# Altium PCB altiumDesignerPCBLayout.pcbdoc
Units mil, origin at the board's own origin, x right, y up, seen from the top; angles counter-clockwise.
Board outline 3803.4 x 3533.4 mil, 2 copper layers (Top Layer, Bottom Layer); 34 components, 50 nets, 158 pads, 40 vias.
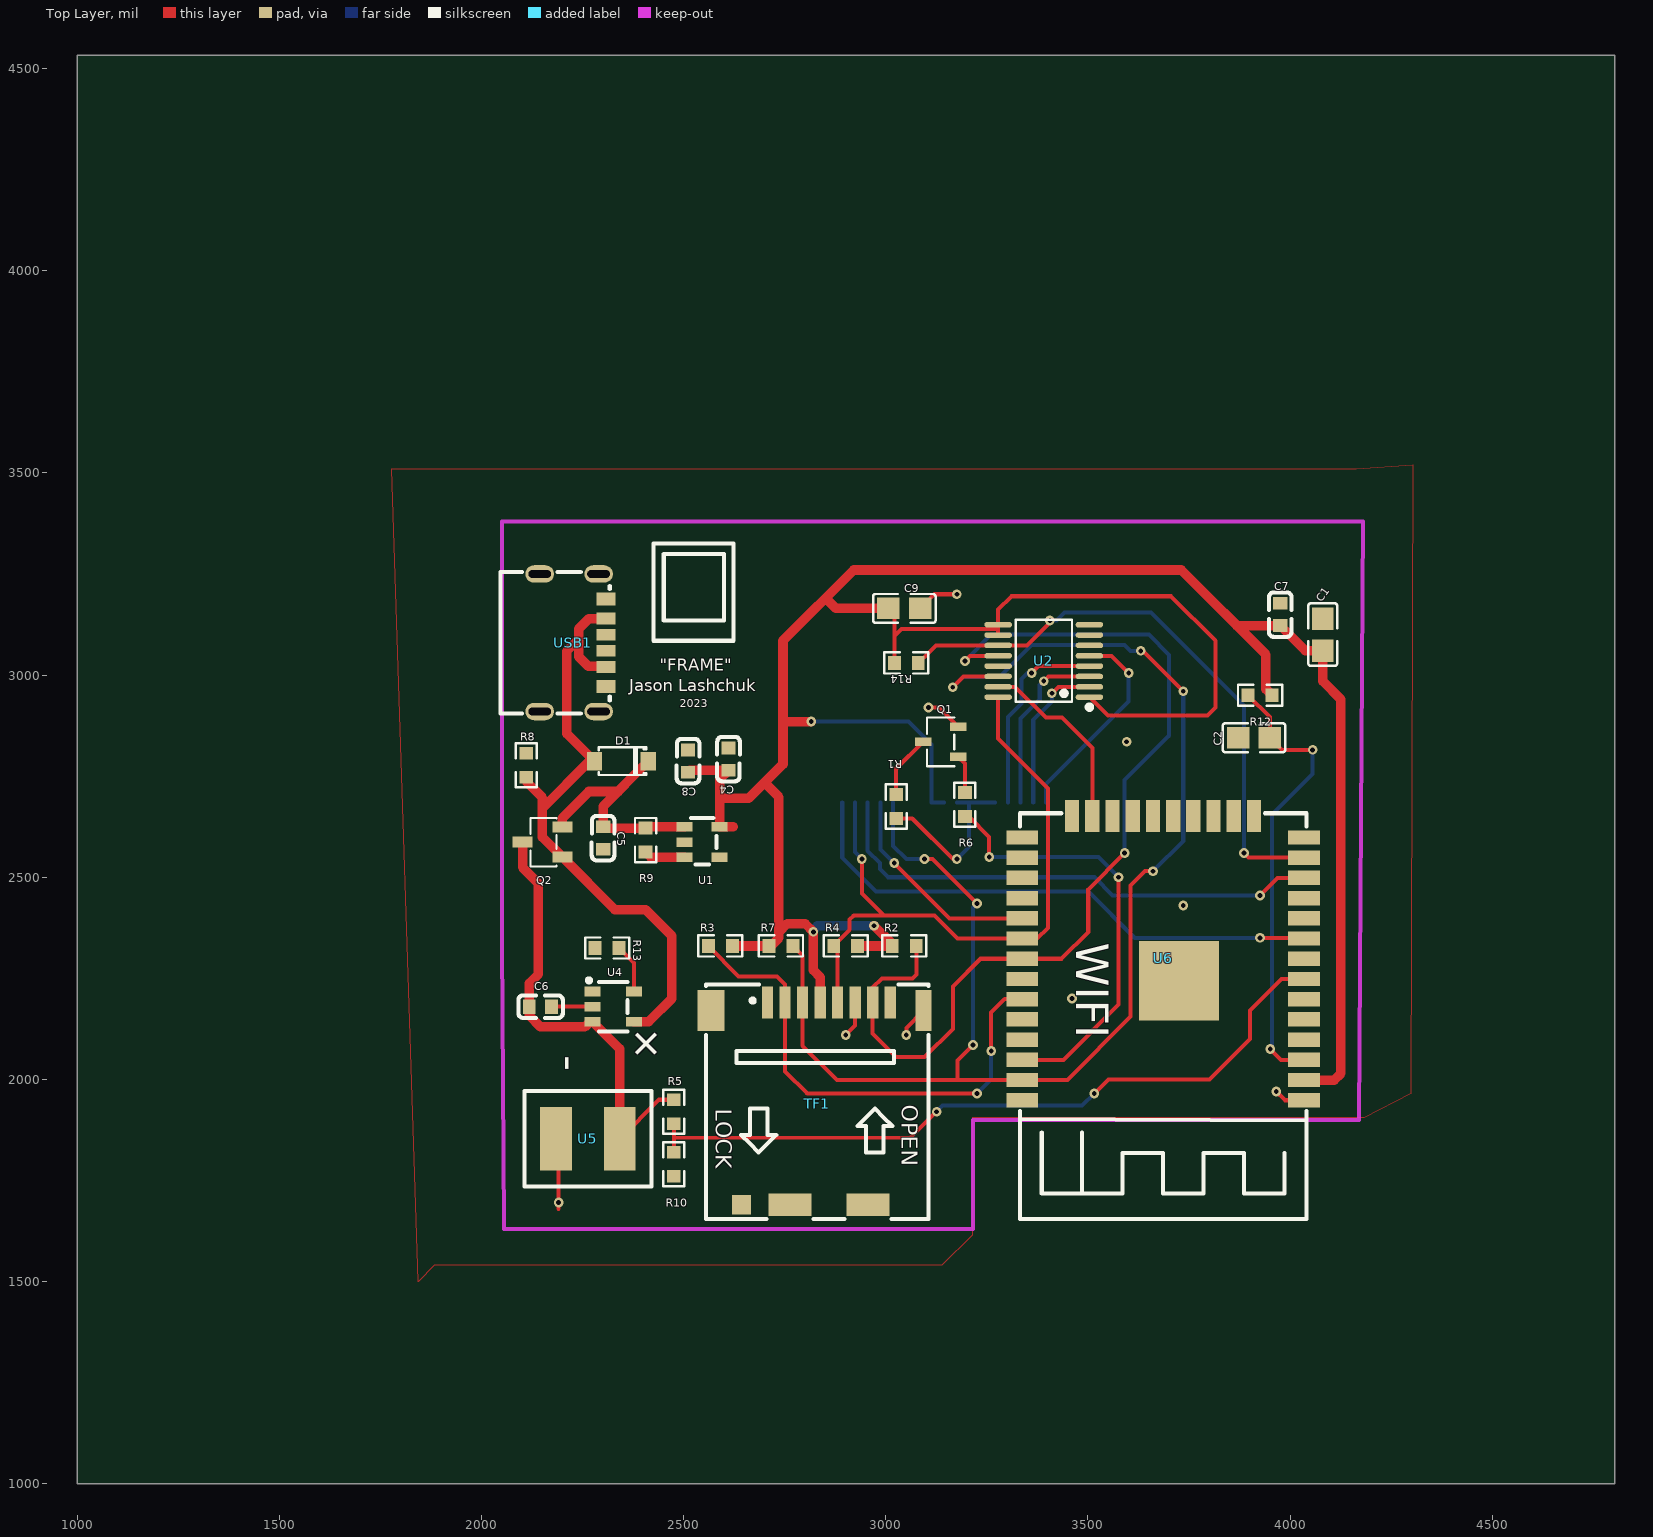
[diagram p0: Top Layer view]
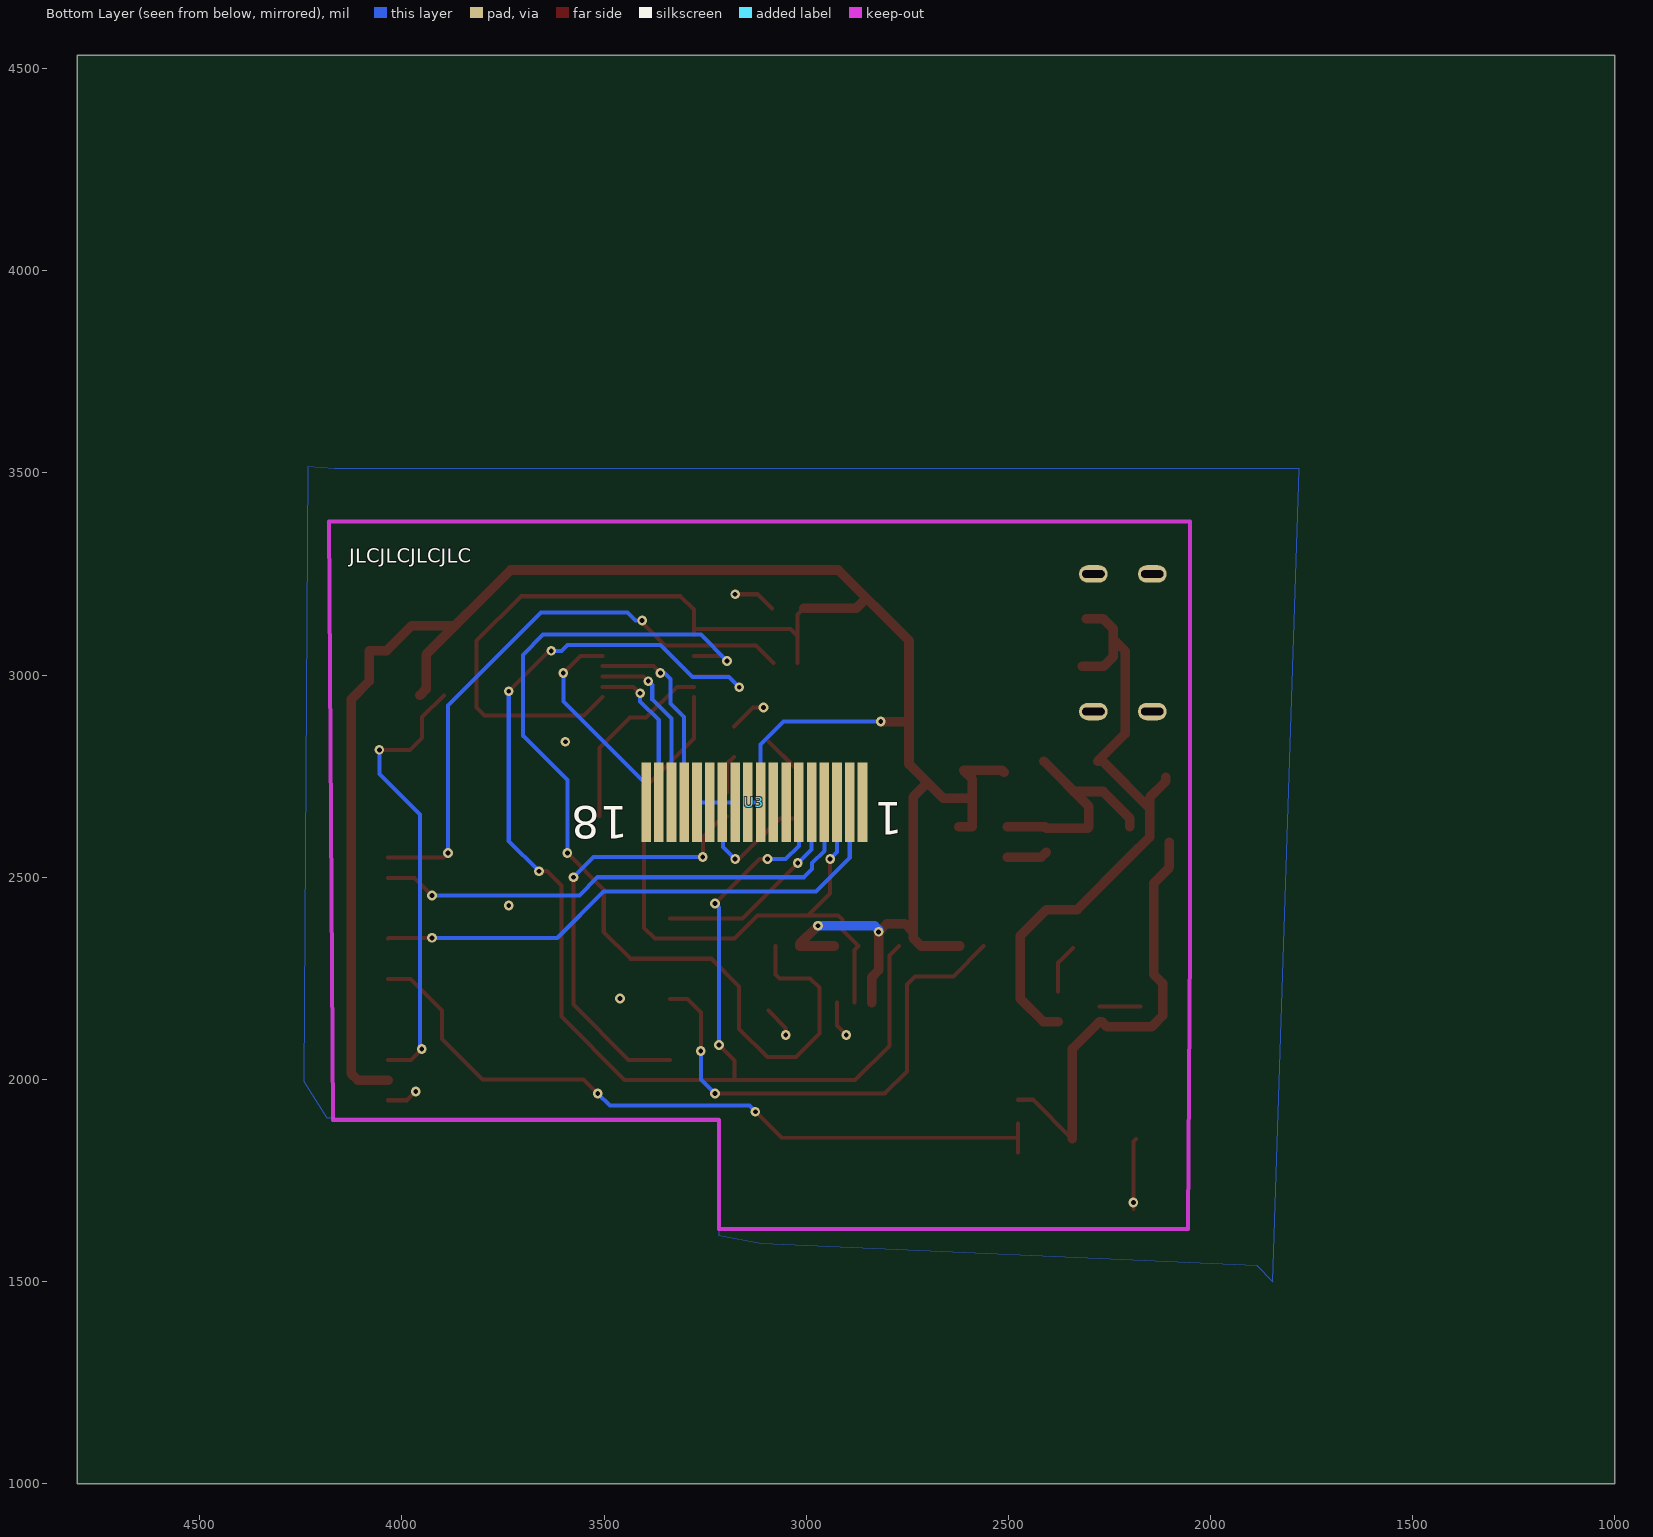
[diagram p1: Bottom Layer view, seen from below]

## Layer stack, top to bottom
Top Layer: signal copper (thickness not stored)
Dielectric: dielectric 12.6, FR-4, Dk 4.8
Bottom Layer: signal copper (thickness not stored)

## Board outline
4803.4,1000 1000,1000 1000,4533.4 4803.4,4533.4

## Components (designator, comment, footprint, x,y, rotation, side; value= is the part's Value field where it differs from the comment)
C1 "0.1uf" C0805 4080.9,3100 r90 top
C2 "0.1uf" C0805 3910.9,2845 r180 top
C4 "10uf" C0603 2610.9,2792.03 r270 top
C5 "10uf" C0603 2300.9,2597.03 r90 top
C6 "10uf" C0603 2145.9,2180 r180 top
C7 "10uf" C0603 3975.9,3150 r90 top
C8 "1uf" C0603 2510.9,2787.03 r270 top
C9 "0.1uf" C0805 3045.9,3165 r0 top
D1 "LMBR120FT1G" SOD-123_L2.8-W1.8-LS3.7-RD 2345.9,2787.03 r180 top
Q1 "S8050_C2146" SOT-23-3_L3.0-W1.7-P0.95-LS2.9-BR 3135.9,2835 r0 top
Q2 "DMG3415U-7" SOT-23-3_L2.9-W1.6-P1.90-LS2.8-BR-CW 2150.9,2587.03 r0 top
R1 "10 r" R0603 3025.9,2675 r270 top
R2 "1k" R0603 3045.9,2330 r180 top
R3 "1k" R0603 2590.9,2330 r0 top
R4 "1k" R0603 2900.9,2330 r180 top
R5 "100k" R0603 2475.9,1920 r90 top
R6 "1k" R0603 3195.9,2679.66 r90 top
R7 "1k" R0603 2740.9,2330 r180 top
R8 "100k" R0603 2110.9,2777.03 r270 top
R9 "100k" R0603 2405.9,2592.03 r90 top
R10 "100k" R0603 2475.9,1790 r90 top
R12 "10k" R0603 3925.9,2950 r180 top
R13 "2k" R0603 2310.9,2325 r180 top
R14 "50k" R0603 3050.9,3030 r0 top
TF1 "DM3CS-SF" TF-SMD_DM3CS-SF 2830.9,1940 r180 top
U1 "TPAP2112K-3.3TRG1" SOT-23-5_L2.9-W1.6-P0.95-LS2.8-BR 2545.9,2587.03 r180 top
U2 "XPT2046" TSSOP-16_L5.0-W4.4-P0.65-LS6.4-BL 3390.9,3035 r90 top
U3 "18 pin 0.8mm pitch LCD SMD connection" "SMD TFT 18PIN 0.8MM" 2860.9,2685 r180 bottom
U4 "MCP73831T-2ACI/OT" SOT-23-5_L3.0-W1.7-P0.95-LS2.8-BR 2325.9,2180 r180 top
U5 "Battery Pad" BATTERY_PAD 2420.9,1735 r180 top
U6 "ESP32-SOLO-1" WIFIM-SMD_38P-L25.5-W18.0-P1.27 3685.9,2300 r180 top
USB1 "HC-TYPE-C-6P-01A" USB-C-SMD_HC-TYPE-C-6P-01A 2225.9,3080 r270 top
? "" ? 1778.95,2505 r0 top
? "" ? 3103.4,3703.2 r0 top

## Footprints (in the part's own frame and the unit in brackets; to place one, negate y for a bottom-side part, rotate by r counter-clockwise, add the part's x,y. Pads: shape width x height; smd on the part's side, far side on the other; paste and mask are expansions set on the pad)
BATTERY_PAD [mm]
  rect 2x4 smd paste+0 mask+0.051: 1(2,-3) 2(6,-3)
  silkscreen extent 0,-6 8,0
C0603 [mm]
  rect 0.8x0.9 smd paste+0 mask+0.051: 1(-0.7,0) 2(0.7,0)
  silkscreen extent -1.41,-0.71 1.39,0.72
C0805 [mm]
  rect 1.41x1.35 smd paste-100 mask+0.051: 1(-1,0) 2(1,0)
  silkscreen extent -1.96,-0.9 1.96,0.9
R0603 [mil]
  rect 31.75x34.02 smd paste-3937.01 mask+2: 1(-29.66,0) 2(29.66,0)
  silkscreen extent -55,-26 55,26
"SMD TFT 18PIN 0.8MM" [mm]
  rect 0.6x5 smd paste+0 mask+0.051: 1(0,0) 2(-0.8,0) 3(-1.6,0) 4(-2.4,0) 5(-3.2,0) 6(-4,0) 7(-4.801,0) 8(-5.601,0) 9(-6.401,0) 10(-7.201,0) 11(-8.001,0) 12(-8.801,0) 13(-9.601,0) 14(-10.399,0) 15(-11.199,0) 16(-11.999,0) 17(-12.799,0) 18(-13.599,0)
SOD-123_L2.8-W1.8-LS3.7-RD [mm]
  rect 0.95x1.15 smd paste+0 mask+0.051: 1(-1.693,0) 2(1.693,0)
  silkscreen extent -1.58,-0.87 1.41,0.87
SOT-23-3_L2.9-W1.6-P1.90-LS2.8-BR-CW [mm]
  rect 1.25x0.7 smd paste+0 mask+0.051: 1(1.25,-0.95) 2(-1.25,0) 3(1.25,0.95)
  silkscreen extent -0.76,-1.52 0.89,1.52
SOT-23-3_L3.0-W1.7-P0.95-LS2.9-BR [mm]
  rect 1.037x0.532 smd paste+0 mask+0.051: 1(1.101,-0.95) 2(1.101,0.95) 3(-1.101,0)
  silkscreen extent -0.86,-1.53 0.86,1.53
SOT-23-5_L2.9-W1.6-P0.95-LS2.8-BR [mm]
  rect 1x0.6 smd paste+0 mask+0.05: 1(1.1,-0.95) 2(1.1,0) 3(1.1,0.95) 4(-1.1,0.95) 5(-1.1,-0.95)
  silkscreen extent -0.89,-1.52 0.7,1.4
SOT-23-5_L3.0-W1.7-P0.95-LS2.8-BR [mm]
  rect 1x0.6 smd paste+0 mask+0.051: 1(1.3,-0.95) 2(1.3,0) 3(1.3,0.95) 4(-1.3,0.95) 5(-1.3,-0.95)
  silkscreen extent -0.9,-1.78 1.65,1.55
TF-SMD_DM3CS-SF [mm]
  rect 0.7x2 smd paste+0 mask+0.051: 1(3.125,-6.35) 2(2.025,-6.35) 3(0.925,-6.35) 4(-0.177,-6.35) 5(-1.275,-6.35) 6(-2.375,-6.35) 7(-3.475,-6.35) 8(-4.575,-6.35)
  rect 2.7x1.4 smd paste+0 mask+0.051: 9(1.724,6.35) 12(-3.176,6.35)
  rect 1.7x2.6 smd paste+0 mask+0.051: 10(6.674,-5.851)
  rect 1x2.6 smd paste+0 mask+0.051: 11(-6.674,-5.851)
  rect 1.2x1.2 smd paste+0 mask+0.051: 13(4.775,6.35)
  silkscreen extent -6.99,-7.49 6.99,7.24
TSSOP-16_L5.0-W4.4-P0.65-LS6.4-BL [mm]
  oval 0.343x1.731 smd paste+0 mask+0.051: 1(-2.275,-2.866) 2(-1.625,-2.866) 3(-0.975,-2.866) 4(-0.325,-2.866) 5(0.325,-2.866) 6(0.975,-2.866) 7(1.625,-2.866) 8(2.275,-2.866) 9(2.275,2.866) 10(1.625,2.866) 11(0.975,2.866) 12(0.325,2.866) 13(-0.325,2.866) 14(-0.975,2.866) 15(-1.625,2.866) 16(-2.275,2.866)
  silkscreen extent -3.05,-3.02 2.58,1.77
USB-C-SMD_HC-TYPE-C-6P-01A [mm]
  oval 1.1x1.8 hole 0.5 slot 1.401 at 90 deg paste+0 mask+0.051: 1(-4.32,1.622) 2(-4.32,-2.078) 3(4.32,1.622) 4(4.32,-2.078)
  rect 0.7x1.2 smd paste-100 mask+0.051: A5(-0.5,2.078) B5(0.5,2.078)
  rect 0.76x1.2 smd paste-100 mask+0.051: A9(1.52,2.078) B9(-1.52,2.078)
  rect 0.8x1.2 smd paste-100 mask+0.051: A12(2.749,2.078) B12(-2.75,2.078)
  silkscreen extent -4.44,-4.54 4.45,2.32
WIFIM-SMD_38P-L25.5-W18.0-P1.27 [mm]
  rect 2x0.9 smd paste+0 mask+0.051: 1(-8.85,8.93) 2(-8.85,7.66) 3(-8.85,6.39) 4(-8.85,5.12) 5(-8.85,3.85) 6(-8.85,2.58) 7(-8.85,1.31) 8(-8.85,0.04) 9(-8.85,-1.23) 10(-8.85,-2.5) 11(-8.85,-3.77) 12(-8.85,-5.04) 13(-8.85,-6.31) 14(-8.85,-7.58) 25(8.85,-7.58) 26(8.85,-6.31) 27(8.85,-5.04) 28(8.85,-3.77) 29(8.85,-2.5) 30(8.85,-1.23) 31(8.85,0.04) 32(8.85,1.31) 33(8.85,2.58) 34(8.85,3.85) 35(8.85,5.12) 36(8.85,6.39) 37(8.85,7.66) 38(8.85,8.93)
  rect 0.9x2 smd paste+0 mask+0.051: 15(-5.715,-8.93) 16(-4.445,-8.93) 17(-3.175,-8.93) 18(-1.905,-8.93) 19(-0.635,-8.93) 20(0.635,-8.93) 21(1.905,-8.93) 22(3.175,-8.93) 23(4.445,-8.93) 24(5.715,-8.93)
  rect 5x5 smd paste+0 mask+0.051: 39(-1,1.43)
  silkscreen extent -9,-9.1 9,16.4
? [mil]

## Via types
v1: diameter 24, hole 12, Top Layer to Bottom Layer, tented both sides, 40 vias

## Nets (pads, with @x,y where several pads share a name; then routed paths per layer and width w, separated by ;. In a path a pad name is that pad's centre, name@x,y a point inside that pad or via, vN(x,y) a via of type N, cw(c..) or ccw(c..) an arc to the next point about the centre after c; other vN are vias at no path point)
+3.3V: C1.1 C4.2 C7.1 C8.2 C9.1 R2.2 R3.2 R4.1 R7.2 R12.1 R14.1 TF1.4 U1.5 U2.1 U2.9 U2.10 U3.9 U3.10 U6.2 | length 7179
  Top Layer w10: C9.1 3021.24,3150.29 R14.1 ; 3021.24,3096.68 3038.74,3114.18 3278.07,3114.18 ; U2.10 U2.9 ; 3278.1,3116.2 3278.1,3162.2 3310.9,3195 3705.9,3195 3815.9,3085 3815.9,2920 3795.9,2900 3549.2,2900 U2.1
  Top Layer w23.62: C8.2 2515.9,2764.47 C4.2 2589.22,2742.78 U1.5 2623.31,2624.43 ; 2589.2,2695 2660.9,2695 2745.9,2780 2745.9,3085.1 2920.8,3260 3730.9,3260 3940.4,3050.5 3940.4,2965.2 R12.1 ; R3.2 R7.2 ; 2668.2,2330 2658.2,2330 2715.9,2330 2735.9,2350 ; 2700,2734.1 2735.9,2698.19 2735.9,2350 ; 2745.9,2880.4 2750.5,2885 v1(2815.9,2885) ; TF1.4 2837.87,2253.03 2820.9,2270 v1(2820.9,2365) 2800.9,2385 2755.9,2385 2735.9,2365 2735.9,2350 ; 2851.37,3190.57 2876.94,3165 C9.1 ; R4.1 R2.2 3016.25,2334.66 v1(2970.9,2380) ; 3845.84,3145.06 3868.46,3122.44 C7.1 4037.71,3060.63 C1.1 ; U6.2 4109.3,1998.4 4125.9,2015 4125.9,2940 4080.9,2985 C1.1
  Bottom Layer w10: v1(2815.9,2885) 3055.9,2885 3112.9,2828 U3.9 ; U3.9 U3.10
  Bottom Layer w23.62: v1@2820.9,2370 2830.9,2380 v1(2970.9,2380)
+VBAT: C6.2 Q2.2 R5.2 U4.3 U5.1 | length 1119.2
  Top Layer w10: U5.1 2438.71,1949.66 R5.2
  Top Layer w23.62: Q2.2 2101.7,2524.2 2140.9,2485 2140.9,2260 2118.3,2237.4 C6.2 ; C6.2 2118.34,2157.56 2145.9,2130 2255.9,2130 2268.5,2142.6 U4.3 2342.16,2075.15 U5.1
+VUSB: D1.2 Q2.1 R8.2 U4.4 USB1.A9 USB1.B9 | length 1611.6
  Top Layer w23.62: R8.2 2110.9,2737.03 2150.9,2697.03 2150.9,2598.83 Q2.1 2329.74,2420 2405.9,2420 2470.9,2355 2470.9,2200 2413.5,2142.6 U4.4 ; 2150.9,2670.54 2267.4,2787.03 D1.2 ; 2240.9,3089.2 2210.9,3059.2 2210.9,2855.4 D1.2 ; USB1.B9 2265.8,3139.9 2240.9,3115 2240.9,3045 2263.7,3022.2 USB1.A9@2317.7,3022.2
BAT_LEVEL: R5.1 R10.2 U6.7 | length 1832.7
  Top Layer w10: R10.2 R5.1 ; 2475.9,1855 3061.76,1855.86 v1(3125.9,1920) ; v1(3515.9,1965) 3550.9,2000 3800.9,2000 3900.9,2100 3900.9,2170 3979.32,2248.42 U6.7
  Bottom Layer w10: v1(3125.9,1920) 3140.9,1935 3485.9,1935 v1(3515.9,1965)
CLK: R4.2 TF1.5 U2.16 U3.3 U6.30 | length 1685.3
  Top Layer w10: R4.2@2870.9,2330 2910.9,2370 2910.9,2395 2920.9,2405 3120.9,2405 3177.48,2348.42 U6.30 ; R4.2 2881.1,2320.14 TF1.5 ; v1(2940.9,2545) 2940.9,2459.89 2995.8,2405 ; U2.16 3278.1,2842.8 3400.9,2720 3400.9,2375 3374.3,2348.4 U6.30
  Bottom Layer w10: U3.3 2923.89,2562.01 v1(2940.9,2545)
GND: C1.2 C2.2 C4.1 C5.1 C6.1 C7.2 C8.1 C9.2 Q1.2 R8.1 R10.1 R13.2 TF1.6 TF1.10 TF1.11 TF1.12 TF1.13 U1.2 U2.6 U2.7 U2.8 U3.1 U3.8 U4.2 U5.2 U6.1 U6.15 U6.38 U6.39 USB1.1 USB1.2 USB1.3 USB1.4 USB1.A12 USB1.B12 | length 720.3
  Top Layer w10: C6.1 U4.2 ; U5.2 2190.9,1846.89 v1(2190.9,1695.59) 2190.9,1680 ; v1(2900.9,2110) 2924.41,2133.51 TF1.6 ; v1(3050.9,2110) 3050.9,2127.56 TF1.11 ; C9.2 3120.27,3200 v1(3175.9,3200) ; v1(3105.9,2920) 3131.66,2920 Q1.2 ; v1(3965.9,1970) 3987.48,1948.42 U6.1
  other v1: 3460.9,2200 3735.9,2430 3595.9,2835
LCD_BL: R6.1 U6.36 | length 1081.4
  Top Layer w10: R6.1 3205.9,2650 3255.9,2600 v1(3255.9,2550) ; U6.36 3439.32,2048.42 3575.9,2185 v1(3575.9,2500)
  Bottom Layer w10: v1(3255.9,2550) 3525.9,2550 v1(3575.9,2500)
LCD_CS: U3.5 U6.29 | length 537.2
  Top Layer w10: v1(3020.9,2535) 3157.48,2398.42 U6.29
  Bottom Layer w10: U3.5 2986.89,2569.02 v1(3020.9,2535)
LCD_DC: U3.4 U6.12 | length 1271
  Top Layer w10: v1(3925.9,2455) 3969.32,2498.42 U6.12
  Bottom Layer w10: U3.4 2955.4,2565.5 2985.9,2535 2985.9,2520 3005.9,2500 3515.9,2500 3560.9,2455 v1(3925.9,2455)
LCD_RST: U3.2 U6.9 | length 1361.3
  Top Layer w10: v1(3925.9,2350) 4032.75,2350 U6.9
  Bottom Layer w10: U3.2 2892.4,2548.5 2975.9,2465 3500.9,2465 3615.9,2350 v1(3925.9,2350)
LEDK: R1.2 U3.11 U3.12 U3.13 U3.14 | length 439.1
  Top Layer w10: R1.2 3065.57,2645.34 3165.91,2545 v1(3175.9,2545)
  Bottom Layer w10: U3.11 U3.12 ; v1(3175.9,2545) 3205.9,2575 3205.9,2683.55 U3.12 ; U3.14@3270.35,2685.01 U3.13 U3.12
MISO: R2.1 TF1.7 U2.12 U6.31 | length 2460.6
  Top Layer w10: R2.1 3075.56,2259.66 3065.9,2250 2990.9,2250 2967.72,2226.82 TF1.7 2967.7,2113.2 3025.9,2055 3095.9,2055 3165.9,2125 3165.9,2230 3234.3,2298.4 U6.31 ; v1(3195.9,3035) 3208.7,3047.8 U2.12 ; U6.31 3434.32,2298.42 3500.9,2365 3500.9,2470 v1(3590.9,2560)
  Bottom Layer w10: v1(3195.9,3035) 3260.9,3100 3650.9,3100 3700.9,3050 3700.9,2850 3590.9,2740 v1(3590.9,2560)
MOSI: R7.1 TF1.3 U2.14 U3.6 U6.37 | length 3653.6
  Top Layer w10: R7.1 2794.49,2306.07 TF1.3 2794.5,2083.2 2879.3,1998.4 3224.6,1998.4 U6.37 3449.32,1998.42 3605.9,2155 3605.9,2480 3640.9,2515 v1(3660.9,2515) ; v1(3095.9,2545) 3115.9,2545 v1(3225.9,2435) ; v1(3165.9,2970) 3192.51,2996.61 U2.14 ; 3177.74,1998.4 3177.74,2046.84 v1(3215.9,2085) ; v1(3630.9,3060) 3635.9,3060 v1(3735.9,2960)
  Bottom Layer w10: U3.6 3018.4,2577.5 3050.9,2545 v1(3095.9,2545) ; v1(3165.9,2970) 3190.9,2995 3280.9,2995 3360.9,3075 3590.9,3075 3605.9,3060 v1(3630.9,3060) ; v1(3215.9,2085) 3215.9,2425 v1(3225.9,2435) ; v1(3660.9,2515) 3735.9,2590 v1(3735.9,2960)
Q1_1: Q1.1 R6.2 | length 95.2
  Top Layer w10: Q1.1 3195.9,2780.96 R6.2
Q1_3: Q1.3 R1.1 | length 157.9
  Top Layer w10: R1.1 3025.9,2768.36 Q1.3
SD_CS: R3.1 TF1.2 U6.33 | length 1246.7
  Top Layer w10: R3.1 2636.24,2255 2730.9,2255 2751.18,2234.72 TF1.2 2751.18,2019.72 2805.9,1965 v1(3225.9,1965) ; v1(3260.9,2070) 3260.9,2165 3294.32,2198.42 U6.33
  Bottom Layer w10: v1(3225.9,1965) 3260.9,2000 v1(3260.9,2070)
TOUCH_CS: U2.15 U6.23 | length 463.8
  Top Layer w10: U2.15 3319.88,2971.02 3395.9,2895 3435.9,2895 3510.9,2820 U6.23
TOUCH_IRQ: R14.2 U2.11 U6.13 | length 1473.5
  Top Layer w10: R14.2 3123.95,3073.39 U2.11 3349.29,3073.39 3405.9,3130 v1(3405.9,3135) ; v1(3885.9,2560) 3897.48,2548.42 U6.13
  Bottom Layer w10: v1(3405.9,3135) 3422.2,3135 3442.2,3155 3655.9,3155 3885.9,2925 v1(3885.9,2560)
U1_1: C5.2 D1.1 Q2.3 R9.2 U1.1 | length 608.5
  Top Layer w10: C5.2 2300.9,2618.8 C5.2@2303,2616.7
  Top Layer w23.62: Q2.3 2200.1,2646.23 2265.9,2712.03 2338.12,2712.03 ; D1.1 2300.9,2675.4 C5.2 2303.8,2621.7 R9.2 2408.64,2624.43 U1.1
U1_3: R9.1 U1.3 | length 102
  Top Layer w23.62: R9.1 2418.64,2549.64 U1.3
U4_5: R13.1 U4.5 | length 122.7
  Top Layer w10: R13.1 2377.09,2288.47 U4.5
U6_3: C2.1 R12.2 U6.3 | length 1126.3
  Top Layer w10: R12.2 3950.27,2895.97 C2.1 3980.27,2815 v1(4055.9,2815) ; v1(3950.9,2075) 3977.48,2048.42 U6.3
  Bottom Layer w10: v1(3950.9,2075) 3955.9,2075 3955.9,2655 4055.9,2755 v1(4055.9,2815)
U6_4: U6.4
U6_5: U6.5
U6_6: U6.6
U6_8: U6.8
U6_10: U6.10
U6_11: U6.11
U6_14: U6.14
U6_16: U6.16
U6_17: U6.17
U6_18: U6.18
U6_19: U6.19
U6_20: U6.20
U6_21: U6.21
U6_22: U6.22
U6_24: U6.24
U6_25: U6.25
U6_26: U6.26
U6_27: U6.27
U6_28: U6.28
U6_32: U6.32
U6_34: U6.34
U6_35: U6.35
USB1_A5: USB1.A5
USB1_B5: USB1.B5
X+: U2.2 U3.17 | length 388.5
  Top Layer w10: v1(3410.9,2955) 3426.92,2971.02 U2.2
  Bottom Layer w10: U3.17 3364.84,2888.94 3410.9,2935 v1(3410.9,2955)
X-: U2.4 U3.15 | length 500.3
  Top Layer w10: v1(3360.9,3005) 3378.11,3022.21 U2.4
  Bottom Layer w10: U3.15 3301.84,2895.94 3335.9,2930 3335.9,2990 3350.9,3005 v1(3360.9,3005)
Y+: U2.3 U3.16 | length 441.5
  Top Layer w10: v1(3390.9,2985) 3402.51,2996.61 U2.3
  Bottom Layer w10: U3.16 3333.34,2892.44 3380.9,2940 3380.9,2975 v1(3390.9,2985)
Y-: U2.5 U3.18 | length 519.6
  Top Layer w10: U2.5 3558.1,3047.8 v1(3600.9,3005)
  Bottom Layer w10: U3.18 3396.33,2730.45 3600.9,2935.02 v1(3600.9,3005)
pads on no net: TF1.1 TF1.8 TF1.9 U1.4 U2.13 U3.7 U4.1

## Polygon pours and split planes (outlines as drawn)
GND on Bottom Layer (solid): 1780.9,3510 4165.9,3510 4233.4,3515 4243.4,1995 4185.9,1905 4085.9,1905 3215.9,1905 3215.9,1615 3110.9,1595 1885.9,1540 1845.9,1500
GND on Top Layer (solid): 1778.4,3510 4163.4,3510 4303.4,3520 4298.4,1965 4183.4,1905 4083.4,1905 3213.4,1905 3213.4,1615 3138.4,1540 1883.4,1540 1843.4,1500

## Silkscreen, mask and mechanical layers (free items; w line width, h text height)
Top Overlay:
  lines w10: 2425.9,3085 2623.4,3085 2623.4,3325 2425.9,3325 2425.9,3085 ; 2450.9,3135 2599.65,3135 2599.65,3300 2450.9,3300 2450.9,3135
  text "\"FRAME\"" at 2440.9,3010.24 h29.53
  text "Jason Lashchuk" at 2365.9,2960.24 h29.53
  text "2023" at 2490.9,2920.16 h19.68
Bottom Overlay:
  text "JLCJLCJLCJLC" at 4130.9,3277.28 h35.43

## Text inside footprints (layer, text, board x,y; h text height)
TF1: Top Overlay "OPEN" at 3039.31,1937.27 h39.37 r270; Top Overlay "LOCK" at 2579.4,1927.43 h39.37 r270
U3: Bottom Overlay "1" at 2760.9,2685 h80 r180; Bottom Overlay "18" at 3440.9,2675 h80 r180
U5: Top Overlay "+" at 2399.19,2031.72 h80 r45; Top Overlay "-" at 2180.9,2060 h80 r270
U6: Top Overlay "WIFI" at 3470.9,2337.79 h80 r270